# EAGLE board printcore_connector (EAGLE 9.5.0)
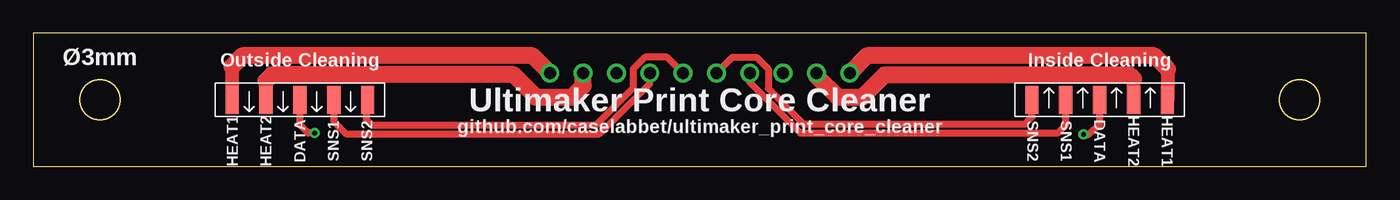
[diagram p0: board, top side]
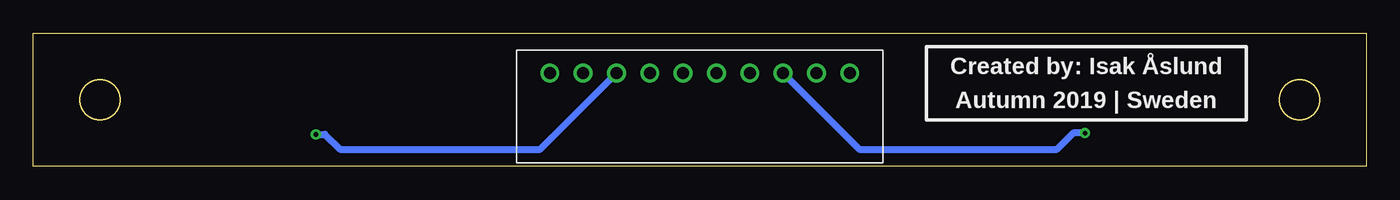
[diagram p1: board, bottom side, seen from below]

Size 100 x 10 mm. Coordinates in mm from the lower left corner, seen from the top.
Outline: 0,0 100,0 100,10 0,10 0,0
Outline: circle at 5,5 radius 1.5
Outline: circle at 95,5 radius 1.5
Copper layers (1*16): Top 0.035mm / dielectric 1.5mm / Bottom 0.035mm
Design rules "default": minimum track width 6mil, minimum drill 0.35mm, track to track 6mil, track to pad 6mil, pad to pad 6mil, via to via 6mil, smd to smd 6mil, copper to edge 40mil, drill to drill 6mil, minimum pad ring 10mil, minimum via ring 8mil, stop-mask expansion 4mil, vias tented up to drill 0mil, thermal gap 10mil

## Footprints (pad centres in the part's own frame; a part is rotated, then mirrored left to right if it is on the bottom)
S10B-EH = drill 0.9: 1 -11.25,0; 2 -8.75,0; 3 -6.25,0; 4 -3.75,0; 5 -1.25,0; 6 1.25,0; 7 3.75,0; 8 6.25,0; 9 8.75,0; 10 11.25,0
ULTIMAKER_PRINTCORE_CONNECTOR = smd 1 x 2.1: DATA 0,0; HEATER@1 5.08,0; HEATER@2 2.54,0; PT100@1 -2.54,0; PT100@2 -5.08,0

## Placement (x,y rotation side)
CONNECTOR  EH_10_Side  [S10B-EH]  50,7 180 bottom
U$1  ULTIMAKER_PRINTCORE_CONNNECTOR  [ULTIMAKER_PRINTCORE_CONNECTOR]  20,5 180 top
U$3  ULTIMAKER_PRINTCORE_CONNNECTOR  [ULTIMAKER_PRINTCORE_CONNECTOR]  80,5 0 top

## Library data of the parts
CONNECTOR = CASE-JST
U$1 U$3 = Isaks Bibliotek

## Nets
DATA_L: CONNECTOR.3 U$1.DATA
DATA_R: CONNECTOR.8 U$3.DATA
HEATER_1_L: CONNECTOR.1 U$1.HEATER@1
HEATER_1_R: CONNECTOR.10 U$3.HEATER@1
HEATER_2_L: CONNECTOR.2 U$1.HEATER@2
HEATER_2_R: CONNECTOR.9 U$3.HEATER@2
PT100_1_L: CONNECTOR.4 U$1.PT100@1
PT100_1_R: CONNECTOR.7 U$3.PT100@1
PT100_2_L: CONNECTOR.5 U$1.PT100@2
PT100_2_R: CONNECTOR.6 U$3.PT100@2

## Tracks (layer width: path | path; a pad name or v marks a point on that pad's centre or on a via)
DATA_L  (via drill 0.35)
  Top 0.508: U$1.DATA 20,3.1 20.6,2.5 v21.1,2.5
  Bottom 0.508: CONNECTOR.3 38.02,1.27 23.2,1.27 21.97,2.5 v21.1,2.5
DATA_R  (via drill 0.35)
  Top 0.508: v78.8,2.4 79.2,2.4 80,3.2 U$3.DATA
  Bottom 0.508: CONNECTOR.8 61.98,1.27 77,1.27 78.13,2.4 v78.8,2.4
HEATER_1_L
  Top 1.016: 14.9,7.5 14.9,5.02 U$1.HEATER@1
  Top 1.27: CONNECTOR.1 37.45,8.3 15.7,8.3 14.9,7.5
HEATER_1_R
  Top 1.016: 85.1,7.3 85.1,5.02 U$3.HEATER@1
  Top 1.27: CONNECTOR.10 62.55,8.3 84.1,8.3 85.1,7.3
HEATER_2_L
  Top 1.016: U$1.HEATER@2 17.46,6.44
  Top 1.27: CONNECTOR.2 41.25,6.05 40.4,5.2 37.7,5.2 36.02,6.88 17.9,6.88 17.46,6.44
HEATER_2_R
  Top 1.016: 82.54,6.56 U$3.HEATER@2
  Top 1.27: CONNECTOR.9 58.75,6.8 60.35,5.2 62.2,5.2 63.88,6.88 82.22,6.88 82.54,6.56
PT100_1_L
  Top 0.508: U$1.PT100@1 22.54,3.36 23.45,2.45 25.12,2.45 25.13,2.44 42.47,2.44 46.25,6.22 CONNECTOR.4
PT100_1_R
  Top 0.508: CONNECTOR.7 53.75,6.3 57.02,3.02 57.55,2.5 76.86,2.5 77.46,3.1 U$3.PT100@1
PT100_2_L
  Top 0.508: CONNECTOR.5 47.55,8.2 45.88,8.2 45,7.32 45,5.9 42.2,3.1 25.4,3.1 25,3.5 25,4.92 U$1.PT100@2
PT100_2_R
  Top 0.508: CONNECTOR.6 52.45,8.2 54.24,8.2 55.14,7.3 55.14,5.84 57.82,3.16 74.36,3.16 74.92,3.72 U$3.PT100@2

## Text on the board
tPlace: Ø3mm | Outside Cleaning | Inside Cleaning | Ultimaker Print Core Cleaner | github.com/caselabbet/ultimaker_print_core_cleaner | HEAT1 / HEAT2 / DATA / SNS1 / SNS2 | HEAT1 / HEAT2 / DATA / SNS1 / SNS2
bPlace: Created by: Isak Åslund / Autumn 2019 | Sweden